# EAGLE board prefinish (EAGLE 4.16), part 1 of 2
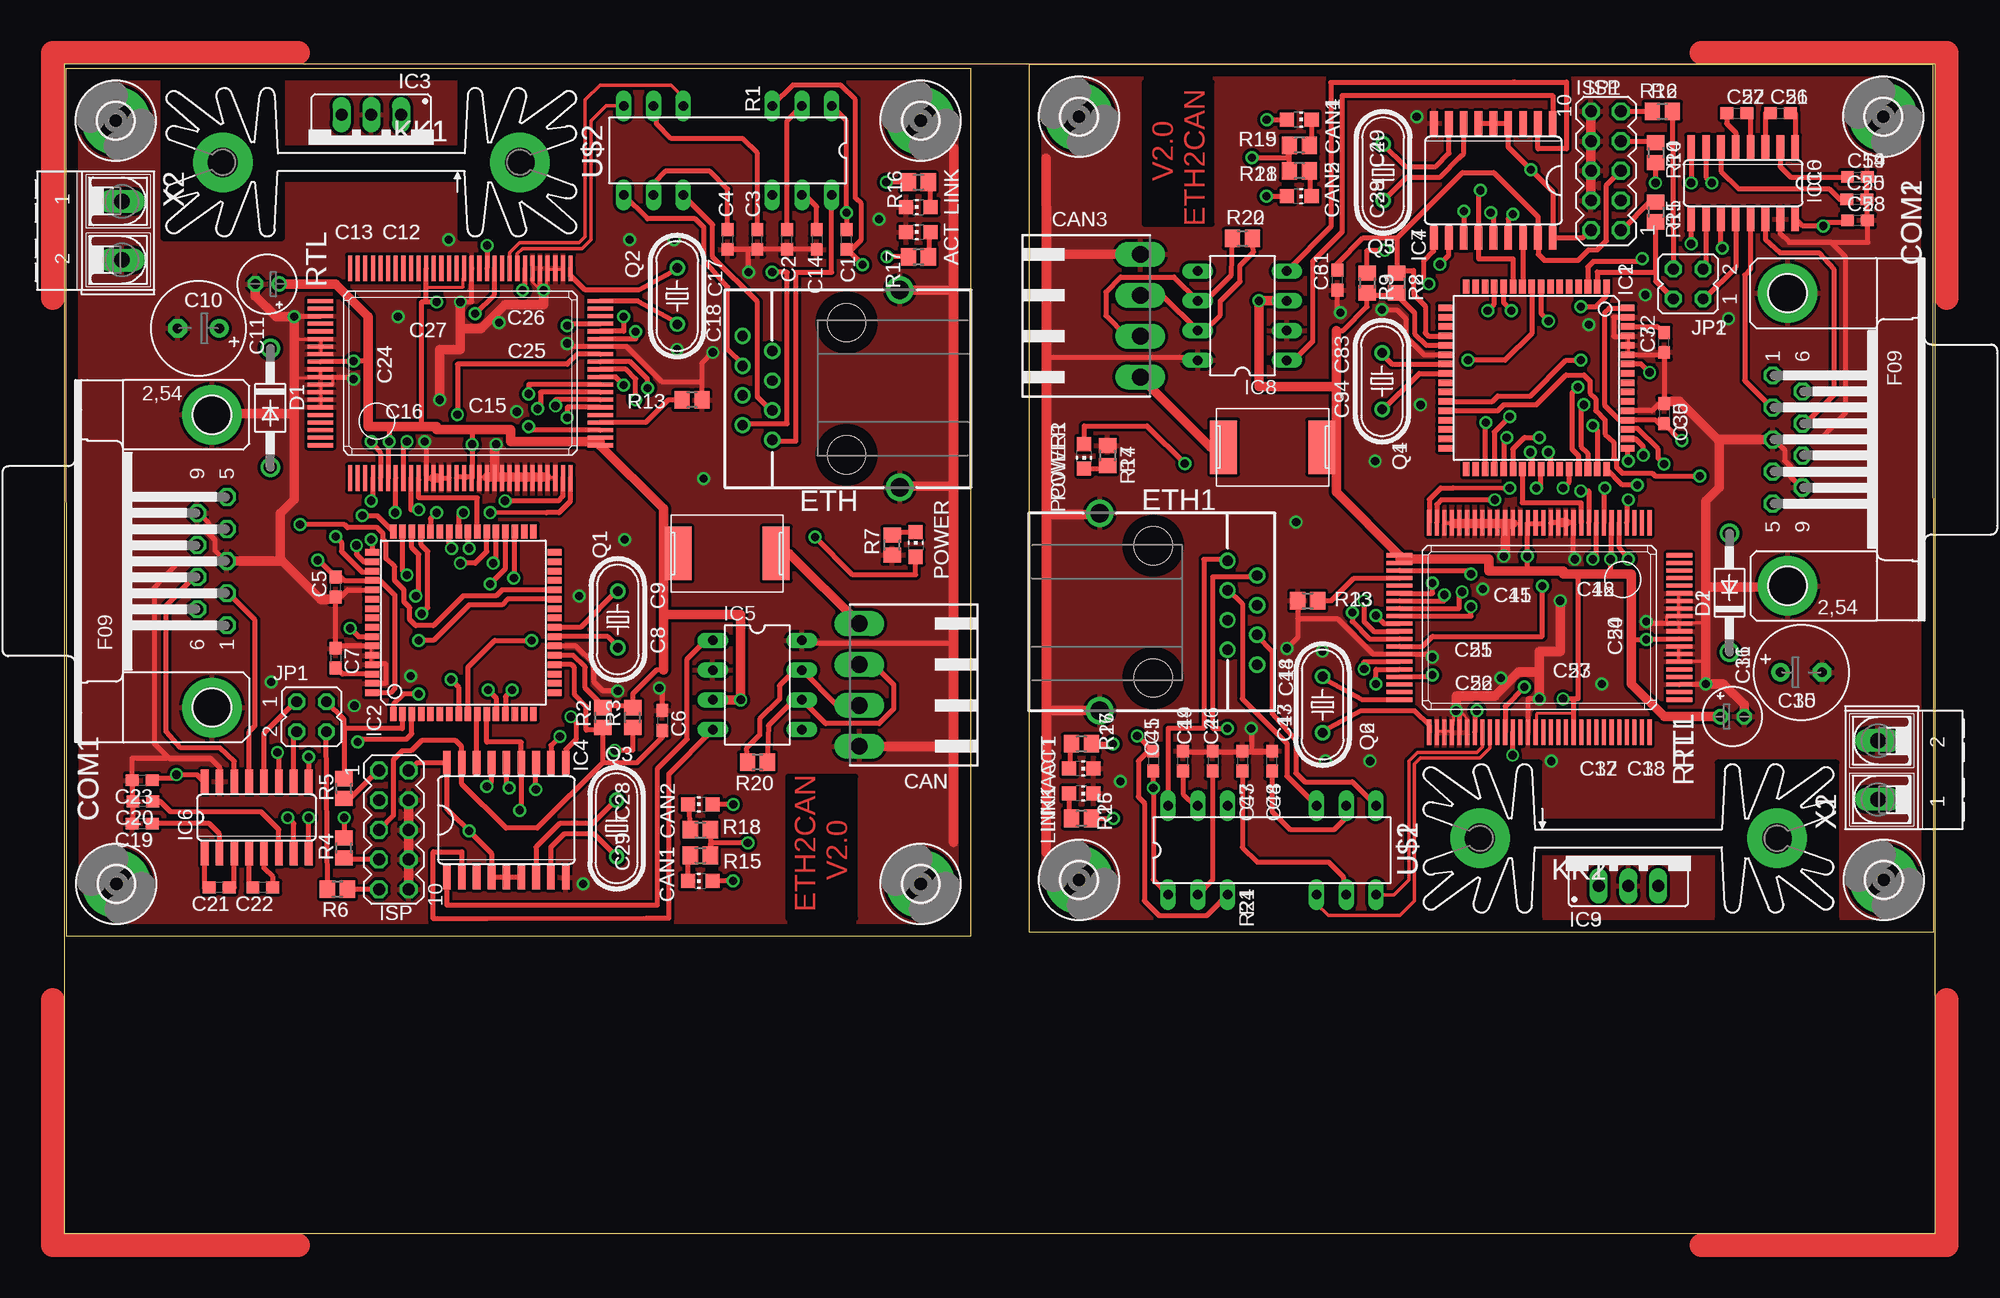
[diagram p0: board, top side]
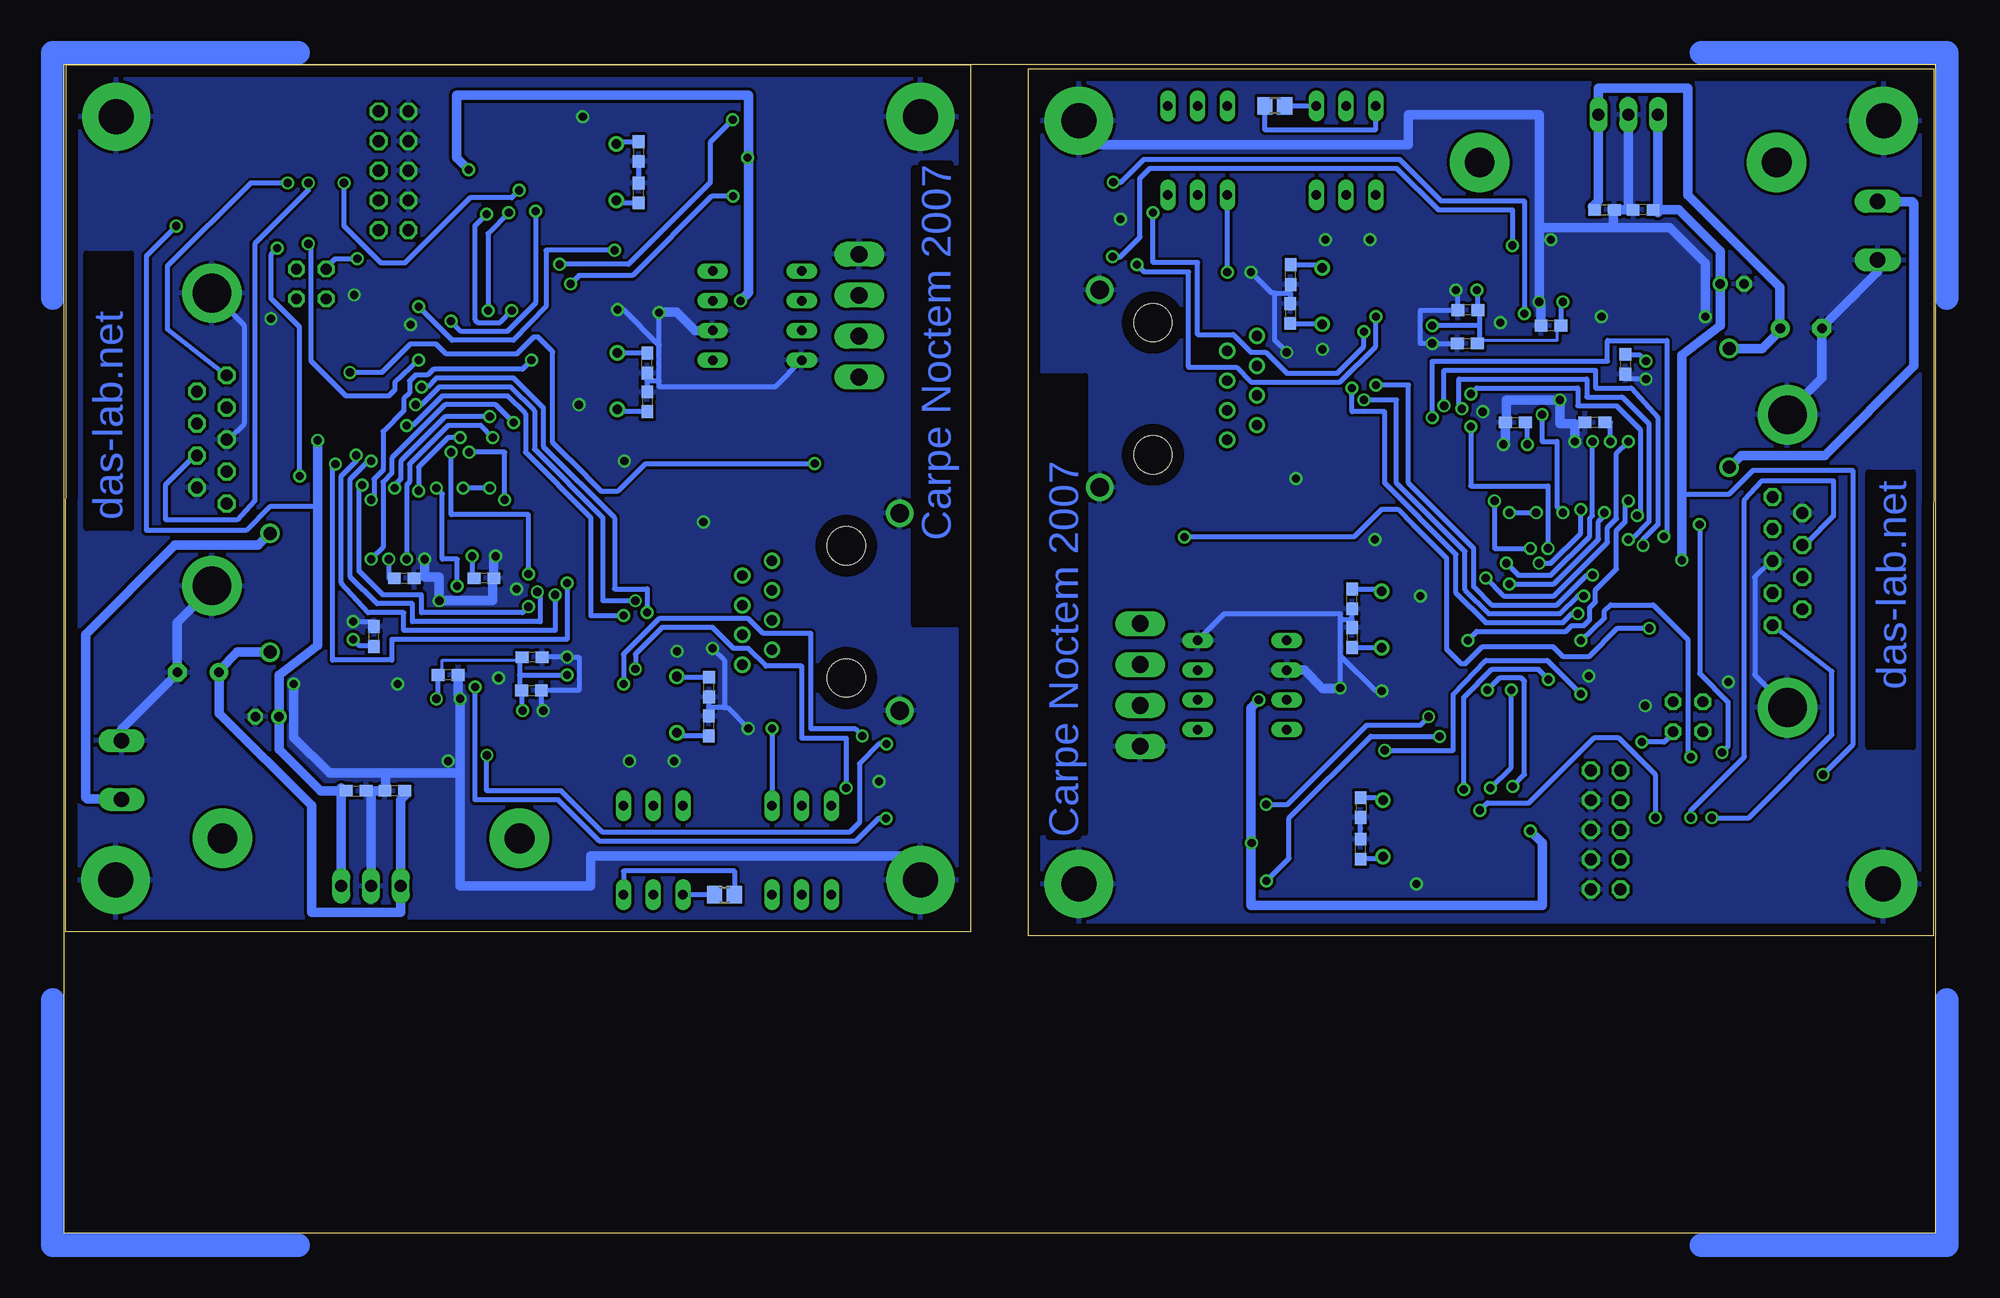
[diagram p1: board, bottom side, seen from below]

Size 160 x 100 mm. Coordinates in mm from the lower left corner, seen from the top.
Outline: 0,0 160,0 160,100 0,100 0,0
Outline: 77.52,25.46 77.52,99.6 0.13,99.6 0.18,25.46 77.52,25.46
Outline: 82.5,99.96 82.5,25.81 159.89,25.81 159.84,99.96 82.5,99.96
Copper layers (1*16): Top 0.035mm / dielectric 1.5mm / Bottom 0.035mm
Design rules "default": minimum track width 10mil, minimum drill 24mil, track to track 8mil, track to pad 8mil, pad to pad 8mil, via to via 8mil, smd to smd 8mil, copper to edge 40mil, drill to drill 8mil, minimum pad ring 10mil, minimum via ring 8mil, stop-mask expansion 4mil, vias tented up to drill 0mil, thermal gap 10mil
tRestrict: area 61.9,27 to 67.6,39.1; area 92.4,86.4 to 98.1,98.4
bRestrict: area 72.7,34.3 to 76.5,73.3; area 1.9,41.6 to 5.7,65.1; area 83.5,52.1 to 87.3,91.1; area 154.3,60.3 to 158.1,83.8

## Footprints (pad centres in the part's own frame; a part is rotated, then mirrored left to right if it is on the bottom)
CHIP-LED0805 = smd 1.2 x 1.2: A 0,-1.05; C 0,1.05
C0603 = smd 1.1 x 1: 1 -0.85,0; 2 0.85,0
E3,5-8 = drill 0.813 pad 1.6 round: + -1.778,0 | drill 0.813 pad 1.6 octagon: - 1.778,0
E2-5 = drill 0.813 pad 1.27 round: + -1.016,0 | drill 0.813 pad 1.27 octagon: - 1.016,0
90-4 = drill 1.422 long: 1 -5.25,5.25; 2 -1.75,5.25; 3 1.75,5.25; 4 5.25,5.25
F09HP = drill 1.016 octagon: 1 -5.486,-1.27; 2 -2.743,-1.27; 3 0,-1.27; 4 2.743,-1.27; 5 5.486,-1.27; 6 -4.115,1.27; 7 -1.372,1.27; 8 1.372,1.27; 9 4.115,1.27 | drill 3.302 pad 5.08 round: G1 -12.522,0; G2 12.522,0
DO41-10 = drill 1.118 round: A 5.08,0; C -5.08,0
557786-1 = drill 0.889 round: 1-1 -4.445,6.35; 1-2 -3.175,8.89; 1-3 -1.905,6.35; 1-4 -0.635,8.89; 1-5 0.635,6.35; 1-6 1.905,8.89; 1-7 3.175,6.35; 1-8 4.445,8.89 | drill 1.575 pad 2.184 round: G1 -8.509,-4.572; G2 8.382,-4.572 | hole 3.251: -5.715,0; 5.588,0
3425L = smd 2.29 x 4.57: P$1 -4.2,0; P$2 4.2,0
3,0-PAD = drill 3 pad 5.842 round: B3,0 0,0
TQFP64 = smd 1.194 x 0.559: 1 -7.8,6; 2 -7.8,5.2; 3 -7.8,4.4; 4 -7.8,3.6; 5 -7.8,2.8; 6 -7.8,2; 7 -7.8,1.2; 8 -7.8,0.4; 9 -7.8,-0.4; 10 -7.8,-1.2; 11 -7.8,-2; 12 -7.8,-2.8; 13 -7.8,-3.6; 14 -7.8,-4.4; 15 -7.8,-5.2; 16 -7.8,-6; 33 7.8,-6; 34 7.8,-5.2; 35 7.8,-4.4; 36 7.8,-3.6; 37 7.8,-2.8; 38 7.8,-2; 39 7.8,-1.2; 40 7.8,-0.4; 41 7.8,0.4; 42 7.8,1.2; 43 7.8,2; 44 7.8,2.8; 45 7.8,3.6; 46 7.8,4.4; 47 7.8,5.2; 48 7.8,6 | smd 0.559 x 1.194: 17 -6,-7.8; 18 -5.2,-7.8; 19 -4.4,-7.8; 20 -3.6,-7.8; 21 -2.8,-7.8; 22 -2,-7.8; 23 -1.2,-7.8; 24 -0.4,-7.8; 25 0.4,-7.8; 26 1.2,-7.8; 27 2,-7.8; 28 2.8,-7.8; 29 3.6,-7.8; 30 4.4,-7.8; 31 5.2,-7.8; 32 6,-7.8; 49 6,7.8; 50 5.2,7.8; 51 4.4,7.8; 52 3.6,7.8; 53 2.8,7.8; 54 2,7.8; 55 1.2,7.8; 56 0.4,7.8; 57 -0.4,7.8; 58 -1.2,7.8; 59 -2,7.8; 60 -2.8,7.8; 61 -3.6,7.8; 62 -4.4,7.8; 63 -5.2,7.8; 64 -6,7.8
78XXS = drill 1.016 long: GND 0,-2.54; IN -2.54,-2.54; OUT 2.54,-2.54
SO18L = smd 0.66 x 2.032: 1 -5.08,-4.902; 2 -3.81,-4.902; 3 -2.54,-4.902; 4 -1.27,-4.902; 5 0,-4.902; 6 1.27,-4.902; 7 2.54,-4.902; 8 3.81,-4.902; 9 5.08,-4.902; 10 5.08,4.902; 11 3.81,4.902; 12 2.54,4.902; 13 1.27,4.902; 14 0,4.902; 15 -1.27,4.902; 16 -2.54,4.902; 17 -3.81,4.902; 18 -5.08,4.902
DIL08 = drill 0.813 long: 1 -3.81,-3.81; 2 -1.27,-3.81; 3 1.27,-3.81; 4 3.81,-3.81; 5 3.81,3.81; 6 1.27,3.81; 7 -1.27,3.81; 8 -3.81,3.81
SO16 = smd 0.66 x 2.032: 1 -4.445,-3.073; 2 -3.175,-3.073; 3 -1.905,-3.073; 4 -0.635,-3.073; 5 0.635,-3.073; 6 1.905,-3.073; 7 3.175,-3.073; 8 4.445,-3.073; 9 4.445,3.073; 10 3.175,3.073; 11 1.905,3.073; 12 0.635,3.073; 13 -0.635,3.073; 14 -1.905,3.073; 15 -3.175,3.073; 16 -4.445,3.073
MA05-2 = drill 1.016 octagon: 1 -5.08,-1.27; 2 -5.08,1.27; 3 -2.54,-1.27; 4 -2.54,1.27; 5 0,-1.27; 6 0,1.27; 7 2.54,-1.27; 8 2.54,1.27; 9 5.08,-1.27; 10 5.08,1.27
JP2Q = drill 0.914 octagon: 1 -1.27,-1.27; 2 -1.27,1.27; 3 1.27,-1.27; 4 1.27,1.27
SK104 = drill 2.54 pad 5.08 round: A2,5 -12.7,-0.762; B2,5 12.7,-0.762
HC49U-V = drill 0.813 round: 1 -2.413,0; 2 2.413,0
R0805 = smd 1.3 x 1.5: 1 -0.85,0; 2 0.85,0
RTL8019AS = smd 0.35 x 2.2: 1 -9.425,-8.965; 2 -8.775,-8.965; 3 -8.125,-8.965; 4 -7.475,-8.965; 5 -6.825,-8.965; 6 -6.175,-8.965; 7 -5.525,-8.965; 8 -4.875,-8.965; 9 -4.225,-8.965; 10 -3.575,-8.965; 11 -2.925,-8.965; 12 -2.275,-8.965; 13 -1.625,-8.965; 14 -0.975,-8.965; 15 -0.325,-8.965; 16 0.325,-8.965; 17 0.975,-8.965; 18 1.625,-8.965; 19 2.275,-8.965; 20 2.925,-8.965; 21 3.575,-8.965; 22 4.225,-8.965; 23 4.875,-8.965; 24 5.525,-8.965; 25 6.175,-8.965; 26 6.825,-8.965; 27 7.475,-8.965; 28 8.125,-8.965; 29 8.775,-8.965; 30 9.425,-8.965; 51 9.425,8.965; 52 8.775,8.965; 53 8.125,8.965; 54 7.475,8.965; 55 6.825,8.965; 56 6.175,8.965; 57 5.525,8.965; 58 4.875,8.965; 59 4.225,8.965; 60 3.575,8.965; 61 2.925,8.965; 62 2.275,8.965; 63 1.625,8.965; 64 0.975,8.965; 65 0.325,8.965; 66 -0.325,8.965; 67 -0.975,8.965; 68 -1.625,8.965; 69 -2.275,8.965; 70 -2.925,8.965; 71 -3.575,8.965; 72 -4.225,8.965; 73 -4.875,8.965; 74 -5.525,8.965; 75 -6.175,8.965; 76 -6.825,8.965; 77 -7.475,8.965; 78 -8.125,8.965; 79 -8.775,8.965; 80 -9.425,8.965 | smd 2.2 x 0.35: 31 11.965,-6.175; 32 11.965,-5.525; 33 11.965,-4.875; 34 11.965,-4.225; 35 11.965,-3.575; 36 11.965,-2.925; 37 11.965,-2.275; 38 11.965,-1.625; 39 11.965,-0.975; 40 11.965,-0.325; 41 11.965,0.325; 42 11.965,0.975; 43 11.965,1.625; 44 11.965,2.275; 45 11.965,2.925; 46 11.965,3.575; 47 11.965,4.225; 48 11.965,4.875; 49 11.965,5.525; 50 11.965,6.175; 81 -11.965,6.175; 82 -11.965,5.525; 83 -11.965,4.875; 84 -11.965,4.225; 85 -11.965,3.575; 86 -11.965,2.925; 87 -11.965,2.275; 88 -11.965,1.625; 89 -11.965,0.975; 90 -11.965,0.325; 91 -11.965,-0.325; 92 -11.965,-0.975; 93 -11.965,-1.625; 94 -11.965,-2.275; 95 -11.965,-2.925; 96 -11.965,-3.575; 97 -11.965,-4.225; 98 -11.965,-4.875; 99 -11.965,-5.525; 100 -11.965,-6.175
DIL16/12 = drill 0.813 long: 1 -8.89,-3.81; 2 -6.35,-3.81; 3 -3.81,-3.81; 4 3.81,-3.81; 5 6.35,-3.81; 6 8.89,-3.81; 7 8.89,3.81; 8 6.35,3.81; 9 3.81,3.81; 10 -3.81,3.81; 11 -6.35,3.81; 12 -8.89,3.81
AK500/2-H = drill 1.321 long: 1 -2.515,0; 2 2.515,0

## Placement (x,y rotation side)
ACT  [CHIP-LED0805]  73.04,85.65 90 top
ACT1  [CHIP-LED0805]  86.98,39.76 270 top
C1  66p  [C0603]  66.89,85.01 90 top
C2  10n  [C0603]  61.81,85.01 90 top
C3  10n  [C0603]  59.27,85.01 90 top
C4  10n  [C0603]  56.73,85.01 270 top
C5  100n  [C0603]  23.2,55.3 90 top
C6  100n  [C0603]  51.14,43.87 270 top
C7  100n  [C0603]  23.2,49.2 270 top
C8  22p  [C0603]  49.87,50.98 270 bottom
C9  22p  [C0603]  49.87,54.28 90 bottom
C10  220µF/25V  [E3,5-8]  11.47,77.42 180 top
C11  10µF/35V  [E2-5]  17.36,81.2 180 top
C12  100n  [C0603]  28.28,87.55 0 bottom
C13  100n  [C0603]  24.98,87.55 180 bottom
C14  10n  [C0603]  64.35,85.01 270 top
C15  100n  [C0603]  35.9,69.37 0 bottom
C16  100n  [C0603]  29.1,69.37 180 bottom
C17  27p  [C0603]  55.13,82.02 90 bottom
C18  27p  [C0603]  55.16,78.69 270 bottom
C19  100n  [C0603]  6.67,35.05 180 top
C20  100n  [C0603]  6.72,36.96 180 top
C21  100n  [C0603]  13.25,29.59 180 top
C22  100n  [C0603]  16.98,29.59 180 top
C23  100n  [C0603]  6.67,38.76 180 top
C24  100n  [C0603]  26.5,74.35 270 bottom
C25  100n  [C0603]  40.02,76.12 0 bottom
C26  100n  [C0603]  39.97,78.97 180 bottom
C27  100n  [C0603]  32.85,77.65 0 bottom
C28  22p  [C0603]  49.14,36.42 270 bottom
C29  22p  [C0603]  49.14,32.87 90 bottom
C30  100n  [C0603]  136.82,70.12 270 top
C31  100n  [C0603]  108.88,81.55 90 top
C32  100n  [C0603]  136.82,76.21 90 top
C33  22p  [C0603]  110.15,74.43 90 bottom
C34  22p  [C0603]  110.15,71.13 270 bottom
C35  220µF/25V  [E3,5-8]  148.55,47.99 0 top
C36  10µF/35V  [E2-5]  142.66,44.21 0 top
C37  100n  [C0603]  131.74,37.86 180 bottom
C38  100n  [C0603]  135.04,37.86 0 bottom
C39  22p  [C0603]  110.88,88.99 90 bottom
C40  22p  [C0603]  110.88,92.54 270 bottom
C41  100n  [C0603]  124.12,56.05 180 bottom
C42  100n  [C0603]  130.92,56.05 0 bottom
C43  27p  [C0603]  104.89,43.4 270 bottom
C44  27p  [C0603]  104.86,46.72 90 bottom
C45  66p  [C0603]  93.13,40.4 270 top
C46  10n  [C0603]  98.21,40.4 270 top
C47  10n  [C0603]  100.75,40.4 270 top
C48  10n  [C0603]  103.29,40.4 90 top
C49  10n  [C0603]  95.67,40.4 90 top
C50  100n  [C0603]  133.52,51.07 90 bottom
C51  100n  [C0603]  120,49.29 180 bottom
C52  100n  [C0603]  120.05,46.44 0 bottom
C53  100n  [C0603]  127.17,47.76 180 bottom
C54  100n  [C0603]  153.35,90.36 0 top
C55  100n  [C0603]  153.3,88.46 0 top
C56  100n  [C0603]  146.77,95.82 0 top
C57  100n  [C0603]  143.04,95.82 0 top
C58  100n  [C0603]  153.35,86.65 0 top
CAN  [90-4]  73.24,46.91 90 top
CAN1  [CHIP-LED0805]  54.39,30.15 90 top
CAN2  [CHIP-LED0805]  54.39,36.7 90 top
CAN3  [90-4]  86.78,78.5 270 top
CAN4  [CHIP-LED0805]  105.63,95.26 270 top
CAN5  [CHIP-LED0805]  105.63,88.71 270 top
COM1  [F09HP]  12.64,57.51 90 top
COM2  [F09HP]  147.38,67.91 270 top
D1  1N4001  [DO41-10]  17.61,70.61 270 top
D2  1N4001  [DO41-10]  142.41,54.8 90 top
ETH  [557786-1]  66.89,72.31 90 top
ETH1  [557786-1]  93.13,53.1 270 top
F1  3425L  [3425L]  103.34,67.25 0 top
F2  3425L  [3425L]  56.68,58.17 180 top
H1  MOUNT-PAD-ROUND3.0  [3,0-PAD]  73.24,95.17 90 top
H2  MOUNT-PAD-ROUND3.0  [3,0-PAD]  4.46,29.9 90 top
H3  MOUNT-PAD-ROUND3.0  [3,0-PAD]  73.24,29.9 90 top
H4  MOUNT-PAD-ROUND3.0  [3,0-PAD]  4.41,95.17 90 top
H5  MOUNT-PAD-ROUND3.0  [3,0-PAD]  86.78,30.24 270 top
H6  MOUNT-PAD-ROUND3.0  [3,0-PAD]  155.56,95.52 270 top
H7  MOUNT-PAD-ROUND3.0  [3,0-PAD]  86.78,95.52 270 top
H8  MOUNT-PAD-ROUND3.0  [3,0-PAD]  155.61,30.24 270 top
IC1  MEGA128-A  [TQFP64]  125.9,73.16 270 top
IC2  MEGA128-A  [TQFP64]  34.12,52.25 90 top
IC3  [78XXS]  26.25,93.14 180 top
IC4  MCP2515-E/SO  [SO18L]  37.81,35.36 0 top
IC5  PCA82C250  [DIL08]  59.27,46.91 270 top
IC6  MAX3232CSE  [SO16]  16.45,35.59 0 top
IC7  MCP2515-E/SO  [SO18L]  122.21,90.06 180 top
IC8  PCA82C250  [DIL08]  100.75,78.5 90 top
IC9  [78XXS]  133.77,32.27 0 top
IC10  MAX3232CSE  [SO16]  143.57,89.83 180 top
ISP  [MA05-2]  28.18,34.52 270 top
ISP1  [MA05-2]  131.84,90.89 90 top
JP1  [JP2Q]  21.15,44.2 270 top
JP2  [JP2Q]  138.87,81.22 90 top
KK1  SK104  [SK104]  26.25,90.86 180 top
KK2  SK104  [SK104]  133.77,34.56 0 top
LINK  [CHIP-LED0805]  73.04,87.78 90 top
LINK1  [CHIP-LED0805]  86.98,37.63 270 top
POWER  [CHIP-LED0805]  72.81,58.93 0 top
POWER1  [CHIP-LED0805]  87.21,66.48 180 top
Q1  16MHz  [HC49U-V]  47.33,52.5 270 top
Q2  20MHz  [HC49U-V]  52.41,80.19 90 top
Q3  16MHz  [HC49U-V]  47.23,34.65 270 top
Q4  16MHz  [HC49U-V]  112.69,72.91 90 top
Q5  16MHz  [HC49U-V]  112.79,90.77 90 top
Q6  20MHz  [HC49U-V]  107.61,45.22 270 top
R1  200  [R0805]  56.48,96.44 180 bottom
R2  10k  [R0805]  46.06,44.12 90 top
R3  1k  [R0805]  48.6,44.12 90 top
R4  4k7  [R0805]  23.91,32.97 90 top
R5  4k7  [R0805]  23.91,38.05 90 top
R6  4k7  [R0805]  23.36,29.44 180 top
R7  2k7  [R0805]  70.8,58.88 90 top
R8  10k  [R0805]  113.96,81.29 270 top
R9  1k  [R0805]  111.42,81.29 270 top
R10  4k7  [R0805]  136.11,92.44 270 top
R11  4k7  [R0805]  136.11,87.36 270 top
R12  4k7  [R0805]  136.66,95.97 0 top
R13  4k7  [R0805]  53.68,71.3 180 top
R14  2k7  [R0805]  89.22,66.54 270 top
R15  2k7  [R0805]  54.39,32.33 0 top
R16  2k7  [R0805]  73.04,89.92 0 top
R17  2k7  [R0805]  73.04,83.54 0 top
R18  2k7  [R0805]  54.39,34.52 0 top
R19  2k7  [R0805]  105.63,93.08 180 top
R20  4k7  [R0805]  59.27,40.31 180 top
R21  2k7  [R0805]  105.63,90.89 180 top
R22  4k7  [R0805]  100.75,85.1 0 top
R23  4k7  [R0805]  106.34,54.11 0 top
R24  200  [R0805]  103.54,28.97 0 bottom
R25  2k7  [R0805]  86.98,35.5 180 top
R26  2k7  [R0805]  86.98,41.87 180 top
RTL  RTL8019AS  [RTL8019AS]  33.87,73.58 0 top
RTL1  RTL8019AS  [RTL8019AS]  126.15,51.83 180 top
U$1  [DIL16/12]  103.29,32.78 0 top
U$2  [DIL16/12]  56.73,92.63 180 top
X1  [AK500/2-H]  155.11,39.64 90 top
X2  [AK500/2-H]  4.91,85.78 270 top

## Library data of the parts
ACT ACT1 CAN1 CAN2 CAN4 CAN5 LINK LINK1 POWER POWER1 = led
C1-C58 R1-R26 = rcl
CAN CAN3 = con-weidmueller-sl35
COM1 COM2 = con-subd
D1 D2 = diode
ETH ETH1 = con-amp
F1 F2 = ptc-littlefuse
H1-H8 = holes
IC1 IC2 = atmel
IC3 IC9 = v-reg
IC4 IC7 = mcp2515
IC5 IC8 = micro-philips
IC6 IC10 = maxim
ISP ISP1 = con-lstb
JP1 JP2 = jumper
KK1 KK2 = heatsink
Q1-Q6 = crystal
RTL RTL1 = rtl8019as
U$1 U$2 = Realtek
X1 X2 = con-ptr500

## Nets
A0: IC2.35 RTL.5
A1: IC2.36 RTL.7
A2: IC2.37 RTL.8
A3: IC2.38 RTL.9
A4: IC2.39 RTL.10
A5: IC2.40 RTL.29
A6: IC2.41 RTL.30
A7: IC2.42 RTL.33
A8: IC1.42 RTL1.33
A9: IC1.41 RTL1.30
A10: IC2.9 RTL.4
A11: IC1.40 RTL1.29
A12: IC1.39 RTL1.10
A13: IC1.38 RTL1.9
A14: IC1.37 RTL1.8
A15: IC1.36 RTL1.7
A16: IC1.35 RTL1.5
A17: IC1.9 RTL1.4
CAN_INT: IC2.8 IC4.12
CAN_INT1: IC1.8 IC7.12
CS: IC2.10 IC4.16
CS1: IC1.10 IC7.16
D0: IC2.51 RTL.36
D1: IC2.50 RTL.37
D2: IC2.49 RTL.38
D3: IC2.48 RTL.39
D4: IC2.47 RTL.40
D5: IC2.46 RTL.41
D6: IC2.45 RTL.42
D7: IC2.44 RTL.43
D8: IC1.51 RTL1.36
D9: IC1.50 RTL1.37
D10: IC1.49 RTL1.38
D11: IC1.48 RTL1.39
D12: IC1.47 RTL1.40
D13: IC1.46 RTL1.41
D14: IC1.45 RTL1.42
D15: IC1.44 RTL1.43
GND: ACT.C C2.1 C3.1 C4.2 C5.1 C6.1 C7.1 C8.1 C9.1 C10.- C11.- C12.2 C13.2 C14.2 C15.1 C16.2 C17.1 C18.1 C19.2 C20.2 C23.2 C24.2 C25.1 C26.2 C27.1 C28.2 C29.2 CAN.1 COM1.3 COM1.9 COM1.G1 COM1.G2 ETH.G1 ETH.G2 H1.B3,0 H2.B3,0 H3.B3,0 H4.B3,0 IC2.22 IC2.53 IC2.59 IC2.60 IC2.61 IC2.63 IC3.GND IC4.9 IC5.2 IC5.8 IC6.15 ISP.4 ISP.6 ISP.8 ISP.10 LINK.C R7.1 R13.1 RTL.11 RTL.12 RTL.13 RTL.14 RTL.18 RTL.19 RTL.20 RTL.21 RTL.22 RTL.23 RTL.24 RTL.25 RTL.26 RTL.27 RTL.28 RTL.44 RTL.52 RTL.53 RTL.54 RTL.55 RTL.56 RTL.64 RTL.83 RTL.86 RTL.87 RTL.88 RTL.90 RTL.91 RTL.92 RTL.93 RTL.94 RTL.95 X2.2
GND1: ACT1.C C30.1 C31.1 C32.1 C33.1 C34.1 C35.- C36.- C37.2 C38.2 C39.2 C40.2 C41.1 C42.2 C43.1 C44.1 C46.1 C47.1 C48.2 C49.2 C50.2 C51.1 C52.2 C53.1 C54.2 C55.2 C58.2 CAN3.1 COM2.3 COM2.9 COM2.G1 COM2.G2 ETH1.G1 ETH1.G2 H5.B3,0 H6.B3,0 H7.B3,0 H8.B3,0 IC1.22 IC1.53 IC1.59 IC1.60 IC1.61 IC1.63 IC7.9 IC8.2 IC8.8 IC9.GND IC10.15 ISP1.4 ISP1.6 ISP1.8 ISP1.10 LINK1.C R14.1 R23.1 RTL1.11 RTL1.12 RTL1.13 RTL1.14 RTL1.18 RTL1.19 RTL1.20 RTL1.21 RTL1.22 RTL1.23 RTL1.24 RTL1.25 RTL1.26 RTL1.27 RTL1.28 RTL1.44 RTL1.52 RTL1.53 RTL1.54 RTL1.55 RTL1.56 RTL1.64 RTL1.83 RTL1.86 RTL1.87 RTL1.88 RTL1.90 RTL1.91 RTL1.92 RTL1.93 RTL1.94 RTL1.95 X1.2
MISO: IC2.13 IC4.15
MISO1: IC1.13 IC7.15
MOSI: IC2.12 IC4.14
MOSI1: IC1.12 IC7.14
N$1: R1.2 RTL.58 U$2.6
N$2: IC4.1 IC5.1
N$3: R1.1 RTL.59 U$2.4
N$4: C1.1 RTL.46 U$2.3
N$5: C7.2 IC2.62
N$6: C9.2 IC2.24 Q1.1
N$7: C8.2 IC2.23 Q1.2
N$8: C10.+ C12.1 D1.C IC3.IN
N$9: POWER.C R7.2
N$10: D1.A X2.1
N$11: C1.2 RTL.45 U$2.1
N$12: C3.2 U$2.5
N$13: C2.2 U$2.2
N$14: C14.1 U$2.11
N$15: C4.1 U$2.8
N$16: CAN.4 F2.P$1
N$17: C21.2 IC6.1
N$18: ETH.1-1 U$2.12
N$19: ETH.1-2 U$2.10
N$20: ETH.1-3 U$2.9
N$21: IC4.2 IC5.4
N$22: ISP.9 R6.1
N$23: CAN.3 IC5.6 R20.1
N$24: ETH.1-6 U$2.7
N$25: ISP.1 R5.1
N$26: IC2.1 R3.1
N$27: CAN1.A IC4.11
N$28: ACT.A R17.2
N$29: ISP.7 R4.1
N$30: C22.2 IC6.4
N$31: LINK.A R16.2
N$32: IC2.58 POWER.A
N$33: IC2.2 JP1.2 R5.2
N$34: C17.2 Q2.2 RTL.51
N$35: C18.2 Q2.1 RTL.50
N$36: C22.1 IC6.5
N$37: C21.1 IC6.3
N$38: CAN2.A IC4.10
N$39: R13.2 RTL.34
N$40: COM1.7 IC6.14
N$41: COM1.8 IC6.8
N$42: C32.2 IC1.62
N$43: C19.1 IC6.2
N$44: IC2.3 JP1.4 R6.2
N$45: R16.1 RTL.61
N$46: C20.1 IC6.6
N$47: R17.1 RTL.62
N$48: CAN1.C R15.1
N$49: COM1.1 IC6.7
N$50: COM1.2 IC6.13
N$51: C34.2 IC1.24 Q4.1
N$52: CAN2.C R18.1
N$53: C28.1 IC4.7 Q3.1
N$54: C29.1 IC4.8 Q3.2
N$55: C33.2 IC1.23 Q4.2
N$56: IC1.1 R9.1
N$57: ISP1.9 R12.1
N$58: ISP1.1 R11.1
N$59: CAN.2 IC5.7 R20.2
N$60: ISP1.7 R10.1
N$61: IC1.58 POWER1.A
N$62: IC7.1 IC8.1
N$63: IC7.2 IC8.4
N$64: C35.+ C37.1 D2.C IC9.IN
N$65: D2.A X1.1
N$66: CAN4.A IC7.11
N$67: CAN5.A IC7.10
N$68: CAN4.C R19.1
N$69: CAN5.C R21.1
N$70: C39.1 IC7.7 Q5.1
N$71: C40.1 IC7.8 Q5.2
N$72: CAN3.3 IC8.6 R22.1
N$73: CAN3.2 IC8.7 R22.2
N$74: C43.2 Q6.2 RTL1.51
N$75: C44.2 Q6.1 RTL1.50
N$76: R23.2 RTL1.34
N$77: R24.2 RTL1.58 U$1.6
N$78: R24.1 RTL1.59 U$1.4
N$79: C45.1 RTL1.46 U$1.3
N$80: C45.2 RTL1.45 U$1.1
N$81: C47.2 U$1.5
N$82: C46.2 U$1.2
N$83: C49.1 U$1.11
N$84: C48.1 U$1.8
N$85: ETH1.1-1 U$1.12
N$86: ETH1.1-2 U$1.10
N$87: ETH1.1-3 U$1.9
N$88: ETH1.1-6 U$1.7
N$89: R25.1 RTL1.61
N$90: R26.1 RTL1.62
N$91: CAN3.4 F1.P$1
N$92: C56.2 IC10.1
N$93: C57.2 IC10.4
N$94: C57.1 IC10.5
N$95: C56.1 IC10.3
N$96: COM2.7 IC10.14
N$97: COM2.8 IC10.8
N$98: C54.1 IC10.2
N$99: C55.1 IC10.6
N$100: COM2.1 IC10.7
N$101: COM2.2 IC10.13
N$102: POWER1.C R14.2
N$103: ACT1.A R26.2
N$104: LINK1.A R25.2
N$105: IC1.3 JP2.4 R12.2
N$106: IC1.2 JP2.2 R11.2
RST: C6.2 IC2.20 IC4.17 ISP.5 R2.1
RST1: C31.2 IC1.20 IC7.17 ISP1.5 R8.1
RXD: IC6.12 JP1.1
RXD1: IC2.27 IC6.9
RXD2: IC1.27 IC10.9
RXD3: IC10.12 JP2.1
SCK: IC2.11 IC4.13 R4.2
SCK1: IC1.11 IC7.13 R10.2
TXD: IC6.10 JP1.3
TXD1: IC2.28 IC6.11
TXD2: IC1.28 IC10.11
TXD3: IC10.10 JP2.3
VCC: C5.2 C11.+ C13.1 C15.2 C16.1 C23.1 C24.1 C25.2 C26.1 C27.2 F2.P$2 IC2.21 IC2.52 IC2.64 IC3.OUT IC4.4 IC4.5 IC4.6 IC4.18 IC5.3 IC6.16 ISP.2 R2.2 R3.2 R15.2 R18.2 RTL.6 RTL.15 RTL.16 RTL.17 RTL.31 RTL.32 RTL.47 RTL.57 RTL.65 RTL.70 RTL.89
VCC1: C30.2 C36.+ C38.1 C41.2 C42.1 C50.1 C51.2 C52.1 C53.2 C58.1 F1.P$2 IC1.21 IC1.52 IC1.64 IC7.4 IC7.5 IC7.6 IC7.18 IC8.3 IC9.OUT IC10.16 ISP1.2 R8.2 R9.2 R19.2 R21.2 RTL1.6 RTL1.15 RTL1.16 RTL1.17 RTL1.31 RTL1.32 RTL1.47 RTL1.57 RTL1.65 RTL1.70 RTL1.89